# Altium PCB PCB1.PcbDoc
Units mm, origin at the board's own origin, x right, y up, seen from the top; angles counter-clockwise.
Board outline 49.4 x 42.91 mm, 2 copper layers (Top Layer, Bottom Layer); 7 components, 4 nets, 16 pads, 0 vias.
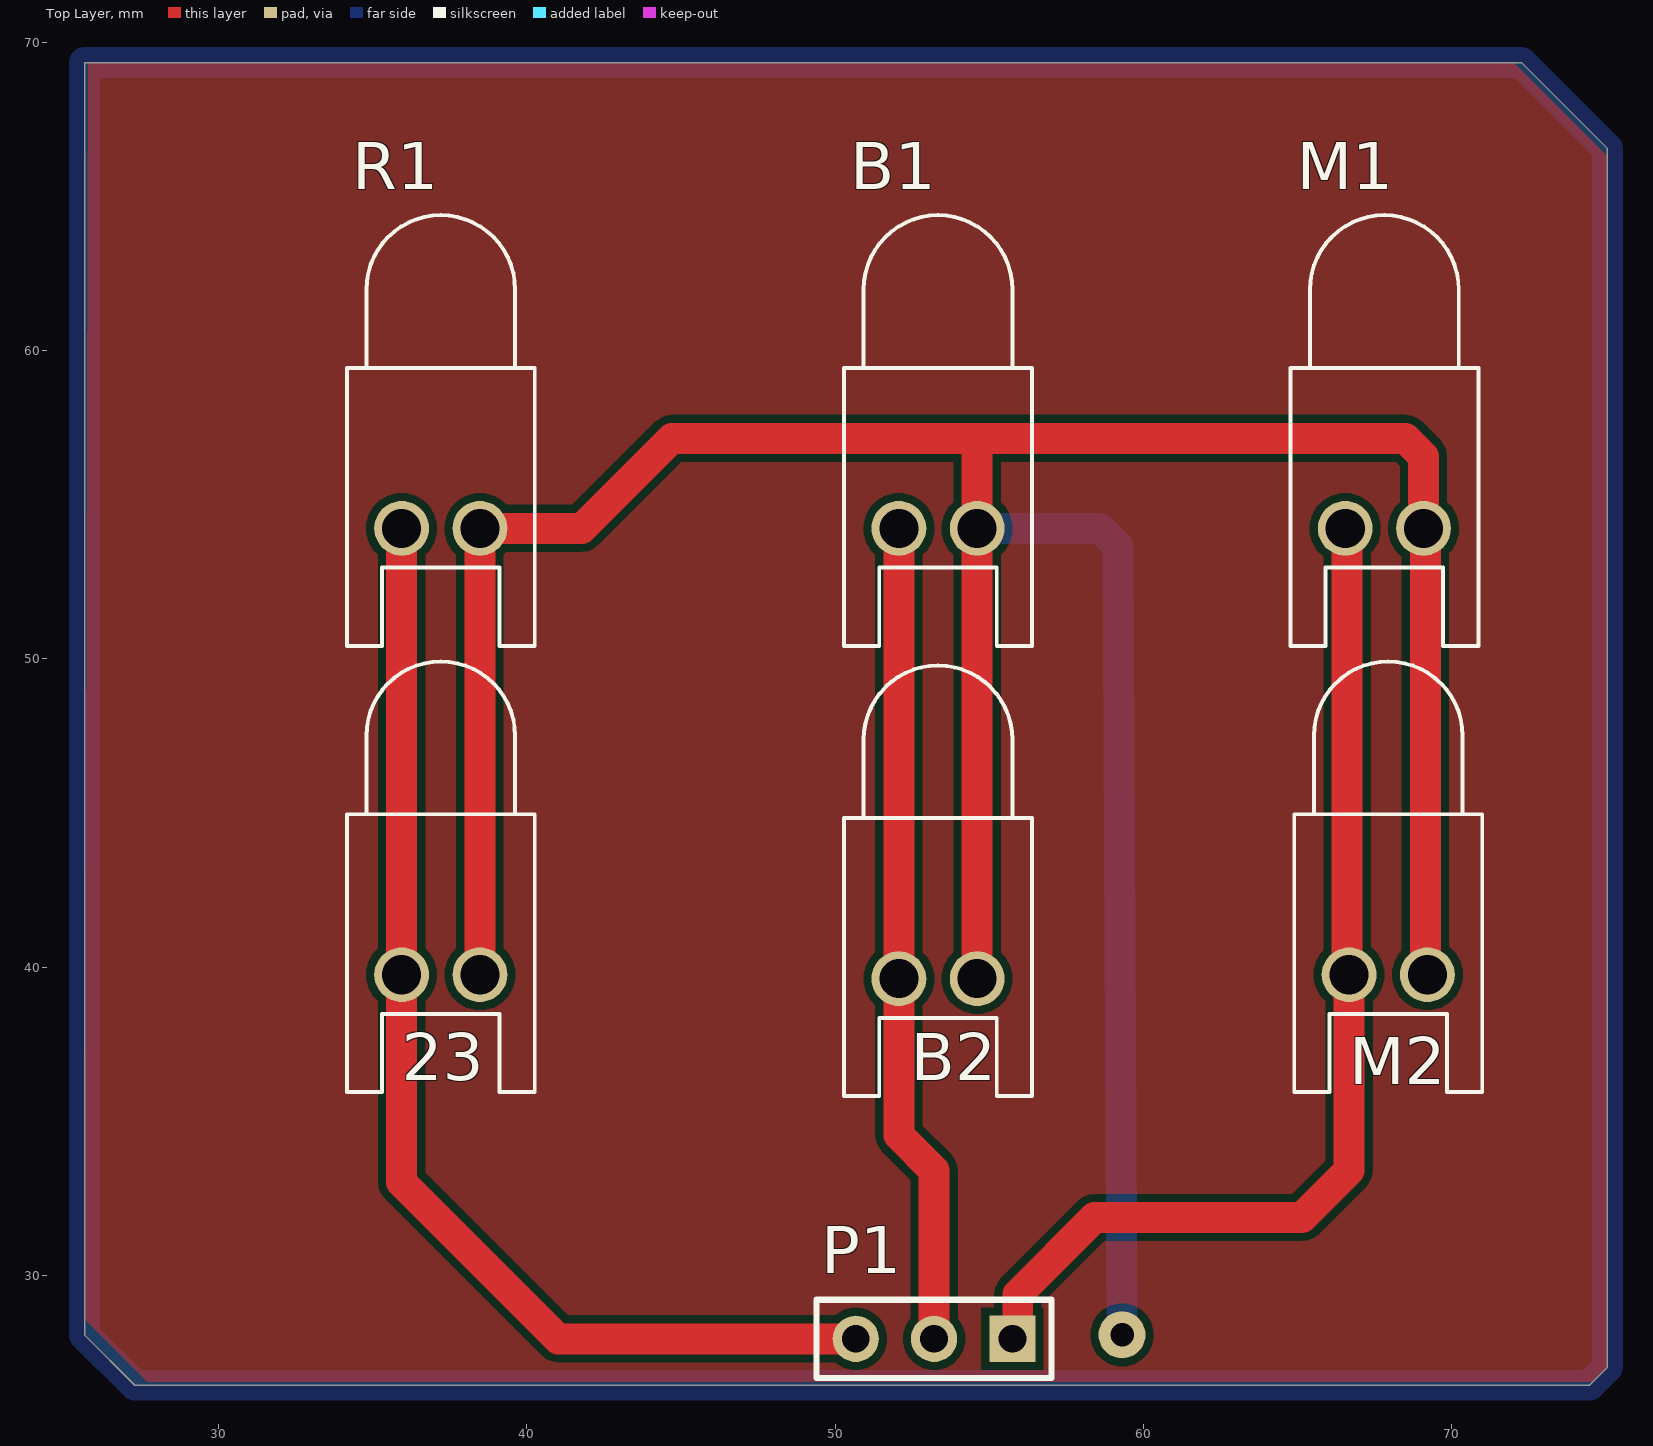
[diagram p0: Top Layer view]
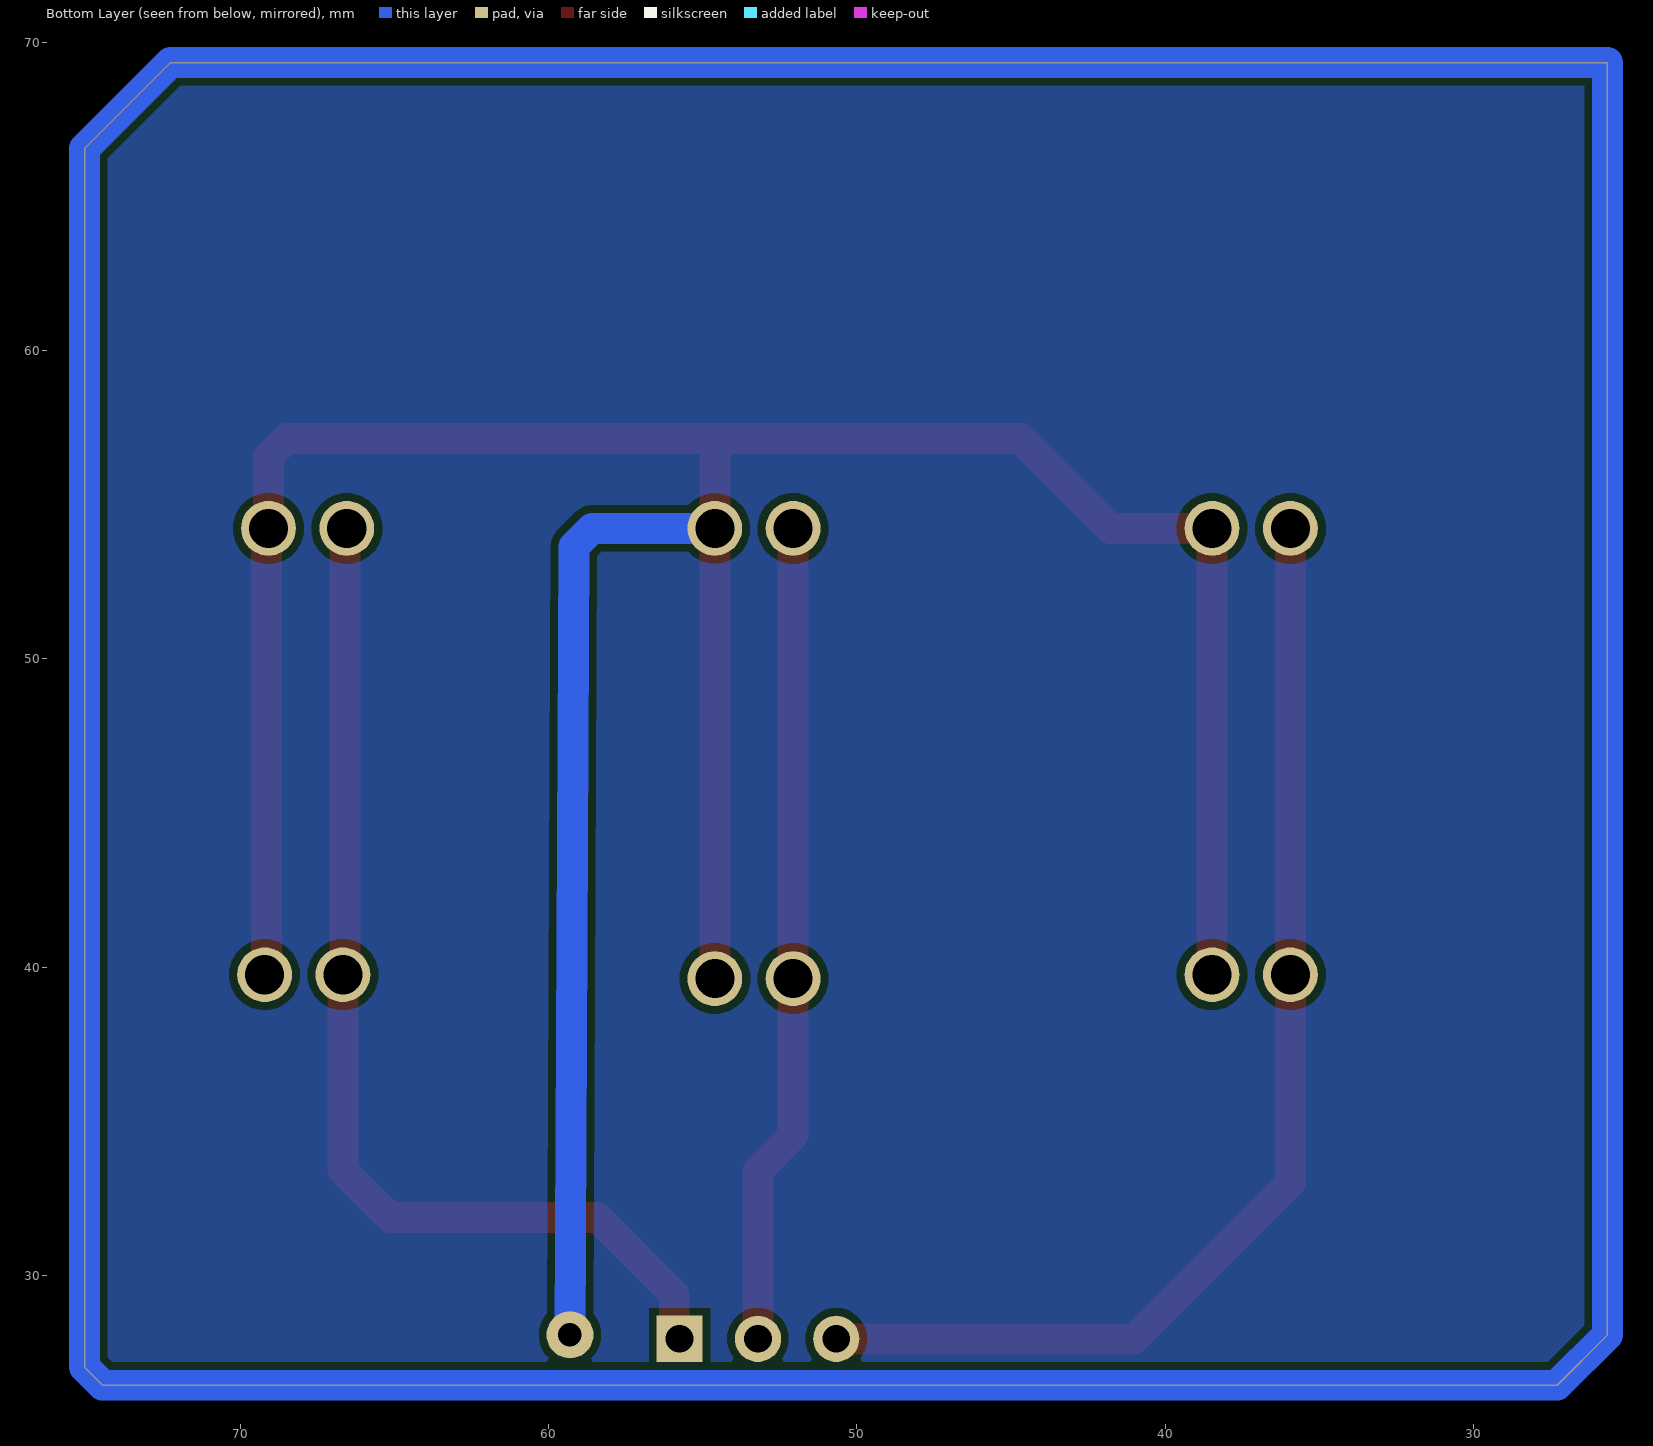
[diagram p1: Bottom Layer view, seen from below]

## Layer stack, top to bottom
Top Solder: solder mask 0.0102, Solder Resist, Dk 3.5
Top Layer: signal copper 0.0356
Dielectric 1: dielectric 0.32, FR-4, Dk 4.8
Bottom Layer: signal copper 0.0356
Bottom Solder: solder mask 0.0102, Solder Resist, Dk 3.5

## Board outline
27.285,26.436 25.654,28.067 25.654,69.342 72.263,69.342 75.057,66.548 75.057,27.022 74.471,26.436

## Design rules (kind name [scope] priority, off if disabled: settings)
Clearance [All] p1: gap=0.254 ignorepadtopadclearanceinfootprint=FALSE except(0: Arc-Hole Track-Hole SMDPad-Hole THPad-Hole Via-Hole Fill-Hole Poly-Hole Region-Hole Text-Hole)
PolygonConnect [All] p1: connectstyle=Relief reliefconductorwidth=0.254 reliefentries=4 polygonreliefangle="90 Angle" airgapwidth=0.254
RoutingVias [All] p1: holewidth=0.711 width=1.27 viastyle="Through Hole" minholewidth=0.711 minwidth=1.27 maxholewidth=0.711 maxwidth=1.27
SolderMaskExpansion [All] p1: expansion=0.102 istentingtop=FALSE
Width [All] p1: maxlimit=1.2 minlimit=0.8 preferedwidth=1
30 further rules are at their usual default settings.

## Components (designator, comment, footprint, x,y, rotation, side; value= is the part's Value field where it differs from the comment)
23 "LED0" LED-0 37.211,39.751 r180 top (schematic designator R2)
B1 "LED0" LED-0 53.34,54.229 r180 top
B2 "LED0" LED-0 53.34,39.624 r180 top
M1 "LED0" LED-0 67.818,54.229 r180 top
M2 "LED0" LED-0 67.945,39.751 r180 top
P1 "Header 3" HDR1X3 55.753,27.94 r180 top
R1 "LED0" LED-0 37.211,54.229 r180 top

## Footprints (in the part's own frame and the unit in brackets; to place one, negate y for a bottom-side part, rotate by r counter-clockwise, add the part's x,y. Pads: shape width x height; smd on the part's side, far side on the other; paste and mask are expansions set on the pad)
HDR1X3 [mm] "Connector; Header; 3 Position"
  rect 1.5x1.5 hole 0.9: 1(0,0)
  round 1.5 hole 0.9: 2(2.54,0) 3(5.08,0)
  silkscreen extent -1.27,-1.27 6.35,1.27
LED-0 [mil] "LED; 2 Leads"
  round 70 hole 50: 1(50,0) 2(-50,0)
  silkscreen extent -120,-400 120,150

## Part data
23 B1 B2 M1 M2 R1: "Typical INFRARED GaAs LED", LatestRevisionDate=08-Jul-2005, LatestRevisionNote="Mech Layer 1 removed.", PackageDescription="LED; 2 Leads", PackageReference=LED-0, Published=8-Jun-2000, Publisher="Altium Limited"
P1: "Header, 3-Pin", LatestRevisionDate=17-Jul-2002, LatestRevisionNote="Re-released for DXP Platform.", Publisher="Altium Limited"

## Free pads (board coordinates)
  round 1.524 hole 0.762: 2(59.309,28.067)

## Nets (pads, with @x,y where several pads share a name; then routed paths per layer and width w, separated by ;. In a path a pad name is that pad's centre, name@x,y a point inside that pad or via, vN(x,y) a via of type N, cw(c..) or ccw(c..) an arc to the next point about the centre after c; other vN are vias at no path point)
NetB1_1: B1.1 B2.1 P1.2 | length 26.8
  Top Layer w1: B1.1 B2.1 52.07,34.544 53.213,33.401 P1.2
NetB1_2: 23.2 B1.2 B2.2 M1.2 M2.2 pad.2 R1.2 | length 111.4
  Top Layer w1: 23.2 R1.2 41.783,54.229 44.704,57.15 54.356,57.15 ; B2.2 B1.2 54.61,56.896 54.356,57.15 ; M2.2 69.151,39.814 69.151,54.165 M1.2 69.088,56.564 68.502,57.15 54.356,57.15
  Bottom Layer w1: B1.2 58.596,54.229 59.182,53.643 pad.2
NetM1_1: M1.1 M2.1 P1.1 | length 34.8
  Top Layer w1: P1.1 55.929,28.116 55.929,29.386 58.42,31.877 65.151,31.877 66.675,33.401 M2.1 66.611,39.814 66.611,54.165 M1.1
NetP1_3: 23.1 P1.3 R1.1 | length 38
  Top Layer w1: R1.1 23.1 35.941,33.02 41.021,27.94 P1.3
copper on no net: | length 181.7
  Bottom Layer w1: 25.654,28.067 25.654,69.342 72.263,69.342 75.057,66.548 75.057,27.022 74.471,26.436 27.285,26.436 25.654,28.067

## Polygon pours and split planes (outlines as drawn)
no net on Top Layer "NONET_L01_P000" (solid, pour order 0): 25.781,69.342 72.009,69.342 75.057,66.294 75.057,27.051 74.549,26.543 27.686,26.543 25.654,28.575
no net on Bottom Layer "NONET_L02_P001" (solid, pour order 1): 25.908,69.342 72.263,69.342 75.057,66.548 75.057,27.022 74.471,26.436 27.285,26.436 25.654,28.067